# Altium PCB MY_PCB_11.PcbDoc (part 2 of 2)
Units mm, origin at the board's own origin, x right, y up, seen from the top; angles counter-clockwise.
Board outline 44.39 x 41.28 mm, 4 copper layers (L1 (SIG), L2 (GND), L3 (GND), L4 (SIG)), stack 1.57 mm thick; 69 components, 54 nets, 293 pads, 149 vias.
Unrouted connection lines stored in the file: 1.
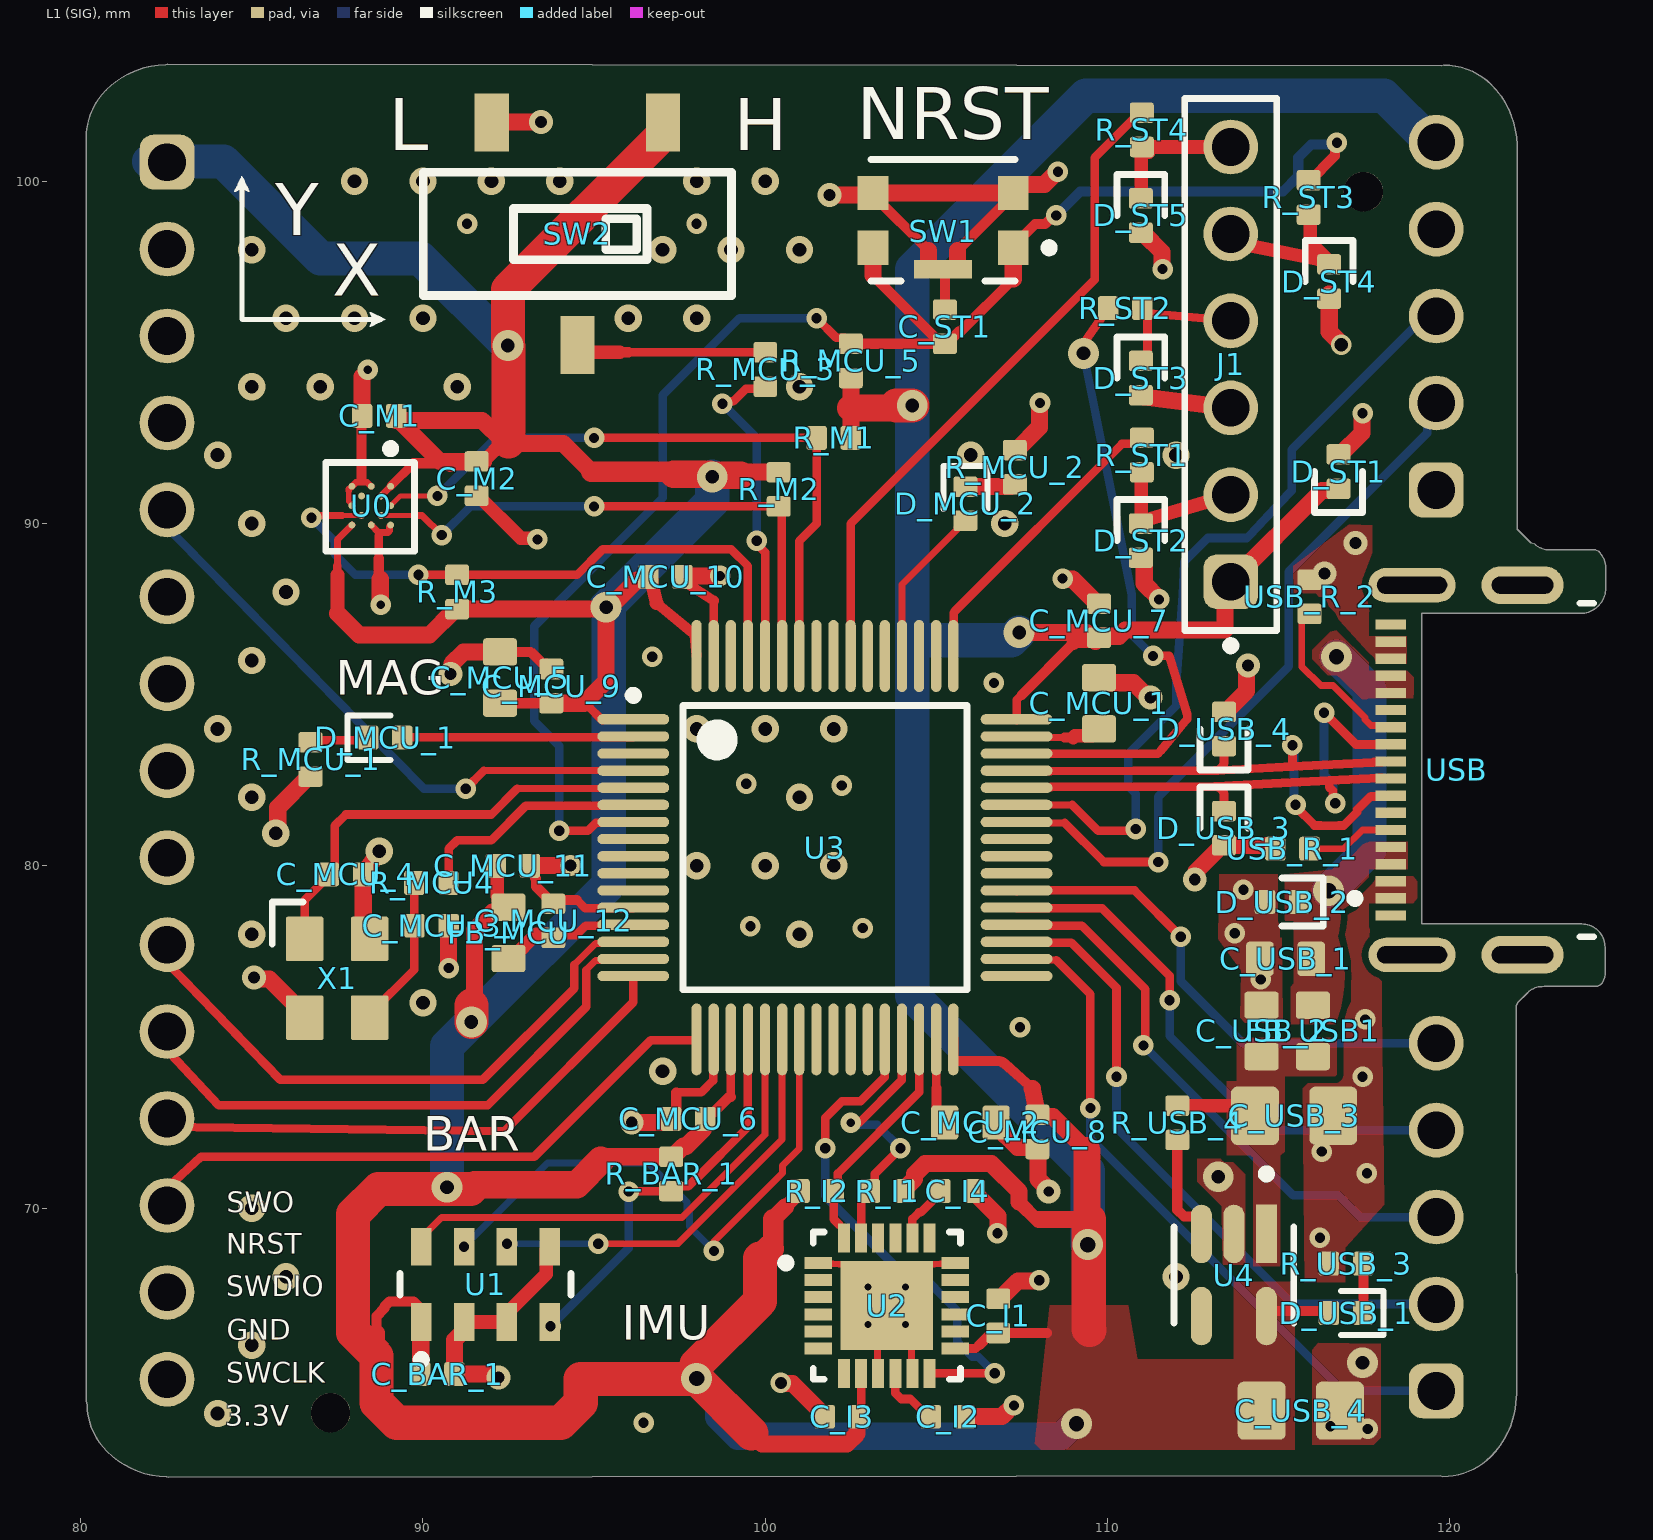
[diagram p0: L1 (SIG) view]

## Silkscreen, mask and mechanical layers (free items; w line width, h text height) (continued)
Top Overlay: (continued)
  text "Y" at 85.679,98.429 h1.52
  text "X" at 87.354,96.654 h1.52
  text "MAG" at 87.454,85.004 h1
  text "BAR" at 90.004,71.679 h1
  text "SWO" at 84.275,69.875 h0.6
  text "NRST" at 84.25,68.675 h0.6
  text "SWDIO" at 84.25,67.425 h0.6
  text "GND" at 84.275,66.15 h0.6
  text "IMU" at 95.804,66.154 h1
  text "SWCLK" at 84.25,64.9 h0.6
  text "3.3V" at 84.225,63.65 h0.6
Bottom Overlay:
  text "3.3V" at 117.746,100.529 h0.8
  text "PK03-FC-V1" at 108.946,100.304 h1.52
  text "3.3V" at 87.321,100.129 h0.8
  text "GND" at 117.671,98.079 h0.8
  text "GND" at 86.671,97.554 h0.8
  text "PA10" at 117.771,95.529 h0.8
  text "GND" at 86.671,94.954 h0.8
  text "PA9" at 117.746,93.079 h0.8
  text "GND" at 86.646,92.429 h0.8
  text "GND" at 117.771,90.604 h0.8
  text "PC15" at 87.296,89.854 h0.8
  text "GND" at 86.521,87.304 h0.8
  text "Designed By" at 107.075,86.63 h3
  text "GND" at 86.546,84.829 h0.8
  text "GND" at 86.571,82.204 h0.8
  text "PRIYANSHU KUMAR" at 113.497,81.62 h3
  text "GND" at 86.546,79.654 h0.8
  text "PA0" at 86.646,77.154 h0.8
  text "PA1" at 86.271,74.504 h0.8
  text "PC7" at 117.696,74.329 h0.8
  text "PA2" at 86.596,72.029 h0.8
  text "PC6" at 117.721,71.779 h0.8
  text "PA3" at 86.521,69.479 h0.8
  text "PB15" at 117.721,69.204 h0.8
  text "GND" at 86.496,66.979 h0.8
  text "PB14" at 117.621,66.804 h0.8
  text "GND" at 86.546,64.354 h0.8
  text "PB13" at 117.621,64.229 h0.8
Mechanical 1:
  lines w0.254: 82.539,103.281 ccw(c82.539,100.866) 80.832,102.573 ccw(c82.143,101.263) 80.289,101.263 80.289,89.031 80.289,76.781 80.289,64.548 80.289,64.356 ccw(c80.376,64.356) 80.315,64.294 ccw(c82.168,64.294) 80.858,62.984 ccw(c82.565,64.691) 82.565,62.277 ; 82.539,103.292 119.818,103.249 ; 82.565,62.265 120.015,62.309 ; 119.793,62.286 ccw(c119.793,64.139) 121.104,62.829 ccw(c119.397,64.536) 121.811,64.536 ; 119.818,103.268 cw(c119.818,101.414) 121.128,102.725 cw(c119.421,101.018) 121.836,101.018 ; 121.823,64.536 121.814,71.659 121.814,75.903 cw(c122.089,75.903) 121.895,76.097 122.182,76.385 cw(c122.695,75.873) 122.695,76.597 ; 121.847,101.018 121.841,95.68 121.841,89.782 ccw(c121.851,89.782) 121.844,89.774 122.286,89.332 ; 122.388,89.312 ccw(c122.9,89.824) 122.9,89.1 124.259,89.1 cw(c123.848,88.69) 124.429,88.69 124.429,88.116 ; 122.695,76.614 124.312,76.614 ccw(c124.082,76.844) 124.406,76.844 124.406,76.964 124.406,77.623 ccw(c123.854,77.623) 123.854,78.175 123.621,78.175 119.05,78.175 119.05,87.5 123.646,87.5 123.812,87.5 ccw(c123.812,88.116) 124.429,88.116 ; 124.429,88.775 124.429,88.116

## Text inside footprints (layer, text, board x,y; h text height)
D_MCU_1: Mechanical 13 "+" at 90.783,83.235 h0.5 r180
D_MCU_2: Mechanical 13 "+" at 105.341,88.693 h0.5 r90
D_USB_1: Mechanical 13 "+" at 115.084,67.445 h0.5